# EAGLE board 32u4 board (EAGLE 7.2.0)
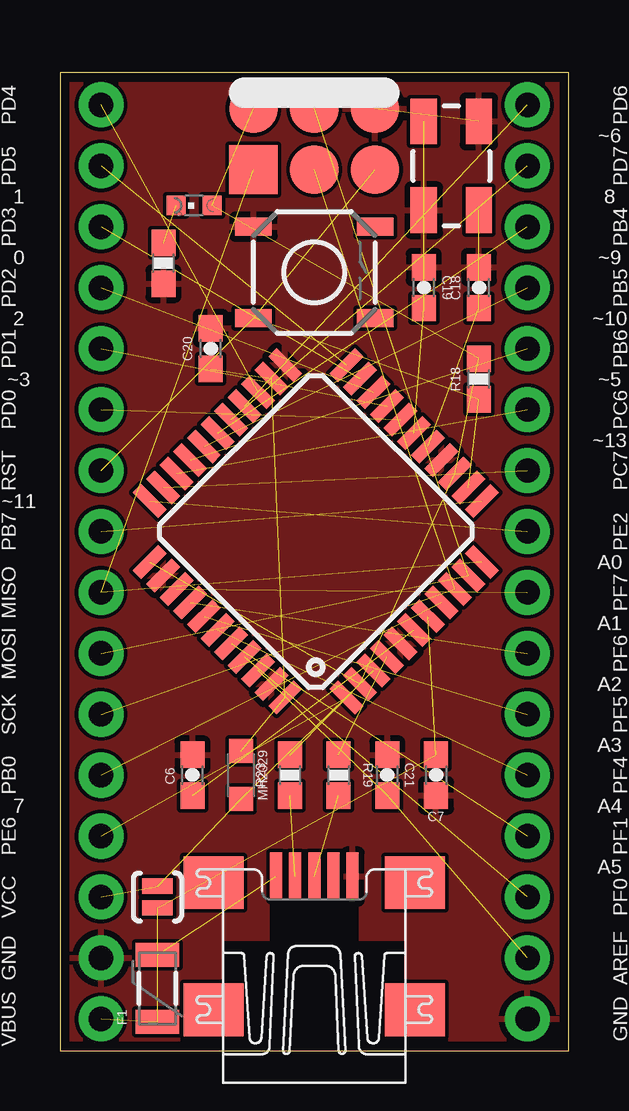
[diagram p0: board, top side]
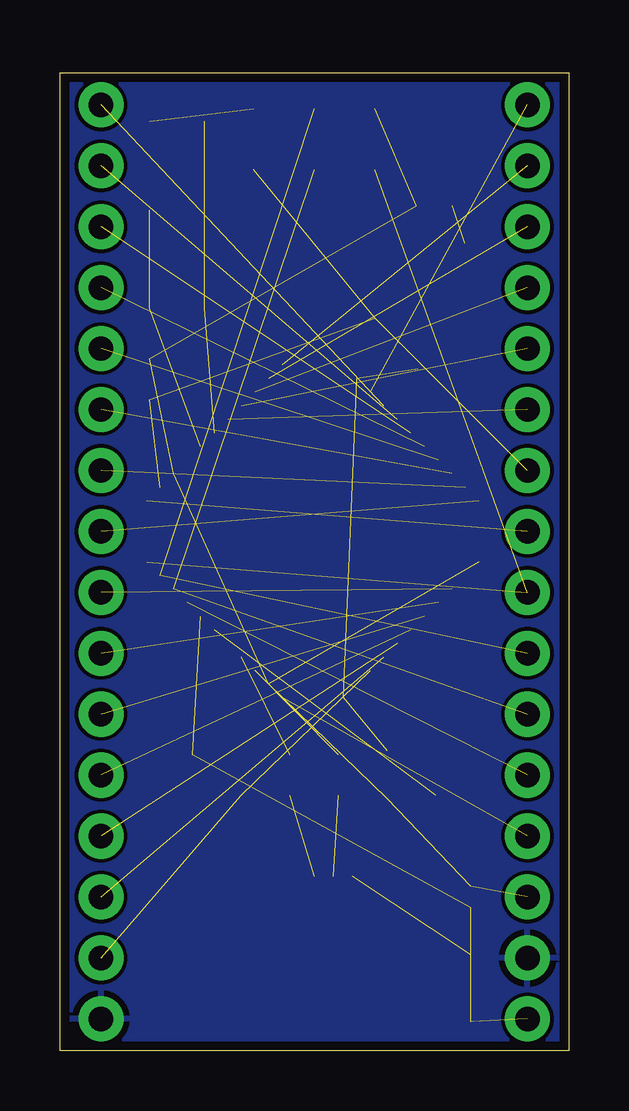
[diagram p1: board, bottom side, seen from below]

Size 21.21 x 40.77 mm. Coordinates in mm from the lower left corner, seen from the top.
Outline: 0,0 21.21,0 21.21,40.77 0,40.77 0,0
Copper layers (1*16): Top 0.0356mm / dielectric 1.5011mm / Bottom 0.0356mm
Design rules "LaenPCBOrder": minimum track width 6mil, minimum drill 13mil, track to track 6mil, track to pad 6mil, pad to pad 6mil, via to via 6mil, smd to smd 6mil, copper to edge 15mil, drill to drill 6mil, minimum pad ring 7mil, minimum via ring 7mil, stop-mask expansion 3mil, vias tented up to drill 0mil, thermal gap 10mil

## Footprints (pad centres in the part's own frame; a part is rotated, then mirrored left to right if it is on the bottom)
0603-CAP = smd 1.1 x 1: 1 -0.85,0; 2 0.85,0
PTC-1206 = smd 1 x 1.8: 1 -1.4,0; 2 1.4,0
1X16_NO_SILK = drill 1.016 pad 1.88: 1 0,0; 2 2.54,0; 3 5.08,0; 4 7.62,0; 5 10.16,0; 6 12.7,0; 7 15.24,0; 8 17.78,0; 9 20.32,0; 10 22.86,0; 11 25.4,0; 12 27.94,0; 13 30.48,0; 14 33.02,0; 15 35.56,0; 16 38.1,0
CHIPLED_0603 = smd 0.8 x 0.8: A 0,-0.75; C 0,0.75
L2012C = smd 1 x 1: 1 -1,0; 2 1,0
0603-RES = smd 1.1 x 1: 1 -0.85,0; 2 0.85,0
TACTILE_SWITCH_SMD = smd 1.524 x 0.762: 1 -2.54,1.905; 2 2.54,1.905; 3 -2.54,-1.905; 4 2.54,-1.905
SJ_2S-NO = smd 0.635 x 1.27: 1 -0.45,0; 2 0.45,0
ICSP = smd 2.032 x 2.032: 1 -2.54,1.27; 2 0,1.27; 3 2.54,1.27; 4 2.54,-1.27; 5 0,-1.27; 6 -2.54,-1.27
TQFP44 = smd 1.5 x 0.5: 1 -5.8,4; 2 -5.8,3.2; 3 -5.8,2.4; 4 -5.8,1.6; 5 -5.8,0.8; 6 -5.8,0; 7 -5.8,-0.8; 8 -5.8,-1.6; 9 -5.8,-2.4; 10 -5.8,-3.2; 11 -5.8,-4; 23 5.8,-4; 24 5.8,-3.2; 25 5.8,-2.4; 26 5.8,-1.6; 27 5.8,-0.8; 28 5.8,0; 29 5.8,0.8; 30 5.8,1.6; 31 5.8,2.4; 32 5.8,3.2; 33 5.8,4 | smd 0.5 x 1.5: 12 -4,-5.8; 13 -3.2,-5.8; 14 -2.4,-5.8; 15 -1.6,-5.8; 16 -0.8,-5.8; 17 0,-5.8; 18 0.8,-5.8; 19 1.6,-5.8; 20 2.4,-5.8; 21 3.2,-5.8; 22 4,-5.8; 34 4,5.8; 35 3.2,5.8; 36 2.4,5.8; 37 1.6,5.8; 38 0.8,5.8; 39 0,5.8; 40 -0.8,5.8; 41 -1.6,5.8; 42 -2.4,5.8; 43 -3.2,5.8; 44 -4,5.8
CRYSTAL-SMD-5X3 = smd 1.9 x 1.1: 1 -1.85,-1.15; 2 1.85,-1.15; 3 1.85,1.15; 4 -1.85,1.15
UX60A-MB-5ST = smd 2 x 0.5: 1 2.25,1.6; 2 2.25,0.8; 3 2.25,0; 4 2.25,-0.8; 5 2.25,-1.6 | smd 2.2 x 2.5: M1 -3.3,-4.2; M2 -3.3,4.2; M3 2,4.2; M4 2,-4.2

## Placement (x,y rotation side)
C6  1uF  [0603-CAP]  5.52,11.49 90 top
C7  1.0uF  [0603-CAP]  15.68,11.49 270 top
C18  18pF  [0603-CAP]  17.47,31.81 90 top
C19  18pF  [0603-CAP]  15.18,31.81 90 top
C20  0.1uF  [0603-CAP]  6.29,29.27 90 top
C21  0.1uF  [0603-CAP]  13.65,11.49 90 top
F1  PTCSMD  [PTC-1206]  4.06,2.6 90 top
JP1  M161X16_NO_SILK  [1X16_NO_SILK]  19.49,39.43 270 top
JP2  M161X16_NO_SILK  [1X16_NO_SILK]  1.71,1.33 90 top
LED1  [CHIPLED_0603]  5.59,35.24 90 top
MH2029  MH2029-300Y  [L2012C]  7.56,11.49 270 top
R1  1k  [0603-RES]  4.32,32.83 90 top
R18  10k  [0603-RES]  17.46,28 90 top
R19  22  [0603-RES]  11.62,11.49 270 top
R23  22  [0603-RES]  9.59,11.49 270 top
S1  SWITCH-MOMENTARY-2SMD  [TACTILE_SWITCH_SMD]  10.6,32.45 0 top
SJ1  SOLDERJUMPERNO  [SJ_2S-NO]  4.06,6.41 90 top
U$2  ICSP_SMD  [ICSP]  10.6,38 0 top
U$3  ATMEGA32U4TQFP-44  [TQFP44]  10.67,21.65 135 top
U$4  CRYSTAL-GROUNDED  [CRYSTAL-SMD-5X3]  16.32,36.89 90 top
X1  MINI-USB-UX60A-MB-5ST  [UX60A-MB-5ST]  10.6,5.02 90 top

## Library data of the parts
C6 C18-C21 = SparkFun-Capacitors; PROD_ID: CAP-00810
C7 = SparkFun-Capacitors; PROD_ID: CAP-00868
F1 = SparkFun-PowerIC; PROD_ID: RES-11150
JP1 JP2 = SparkFun-Connectors
LED1 = adafruit
MH2029 = resistor
R1 = SparkFun-Resistors
R18 R19 R23 = SparkFun-Passives
S1 = SparkFun-Electromechanical
SJ1 = SparkFun-Retired
U$2 = Jake
U$3 = SparkFun-DigitalIC
U$4 = SparkFun-FreqCtrl
X1 = con-hirose; OC_FARNELL: unknown; OC_NEWARK: unknown

## Nets
AREF: C21.1 JP1.15 U$3.42
D+: R19.2 X1.3
D-: R23.2 X1.2
GND: C6.2 C7.2 C18.2 C19.2 C20.2 C21.2 JP1.16 JP2.2 R1.1 S1.1 U$2.3 U$3.5 U$3.15 U$3.23 U$3.35 U$3.43 U$4.2 U$4.4 X1.5
MISO: JP2.8 U$2.6 U$3.11
MOSI: JP2.7 U$2.2 U$3.10
N$1: LED1.C R1.2
N$2: F1.2 X1.1
N$23: R19.1 U$3.4
N$24: R23.1 U$3.3
N$27: C6.1 U$3.6
N$31: C20.1 MH2029.1 U$3.24 U$3.44
N$39: C19.1 U$3.17 U$4.3
N$41: C18.1 U$3.16 U$4.1
PB0: JP2.5 U$3.8
PB4: JP1.3 U$3.28
PB5: JP1.4 U$3.29
PB6: JP1.5 U$3.30
PB7: JP2.9 U$3.12
PC6: JP1.6 U$3.31
PC7: JP1.7 U$3.32
PD0: JP2.11 U$3.18
PD1: JP2.12 U$3.19
PD2: JP2.13 U$3.20
PD3: JP2.14 U$3.21
PD4: JP2.16 U$3.25
PD5: JP2.15 U$3.22
PD6: JP1.1 U$3.26
PD7: JP1.2 U$3.27
PE2: JP1.8 U$3.33
PE6: JP2.4 U$3.1
PF0: JP1.14 U$3.41
PF1: JP1.13 U$3.40
PF4: JP1.12 U$3.39
PF5: JP1.11 U$3.38
PF6: JP1.10 U$3.37
PF7: JP1.9 U$3.36
RST: JP2.10 R18.1 S1.3 U$2.4 U$3.13
SCK: JP2.6 U$2.5 U$3.9
VBUS: C7.1 F1.1 JP2.1 SJ1.1 U$3.7
VCC: JP2.3 LED1.A MH2029.2 R18.2 SJ1.2 U$2.1 U$3.2 U$3.14 U$3.34

## Tracks (layer width: path | path; a pad name or v marks a point on that pad's centre or on a via)
AREF  (2 unrouted)
D+  (1 unrouted)
D-  (1 unrouted)
GND  (1 unrouted)
  pour Bottom: -5.33,-2.03 31.11,-1.71 30.99,50.8 -5.33,50.8
  pour Top: -6.1,51.56 31.75,51.56 31.88,-2.48 -6.03,-2.79
MISO  (2 unrouted)
MOSI  (2 unrouted)
N$1  (1 unrouted)
N$2  (1 unrouted)
N$23  (1 unrouted)
N$24  (1 unrouted)
N$27  (1 unrouted)
N$31  (3 unrouted)
N$39  (2 unrouted)
N$41  (2 unrouted)
PB0  (1 unrouted)
PB4  (1 unrouted)
PB5  (1 unrouted)
PB6  (1 unrouted)
PB7  (1 unrouted)
PC6  (1 unrouted)
PC7  (1 unrouted)
PD0  (1 unrouted)
PD1  (1 unrouted)
PD2  (1 unrouted)
PD3  (1 unrouted)
PD4  (1 unrouted)
PD5  (1 unrouted)
PD6  (1 unrouted)
PD7  (1 unrouted)
PE2  (1 unrouted)
PE6  (1 unrouted)
PF0  (1 unrouted)
PF1  (1 unrouted)
PF4  (1 unrouted)
PF5  (1 unrouted)
PF6  (1 unrouted)
PF7  (1 unrouted)
RST  (4 unrouted)
SCK  (2 unrouted)
VBUS  (4 unrouted)
VCC  (8 unrouted)

## Text on the board
tNames: 4 | PD4 | PD6 | ~12 | ~6 | PD5 | PD7 | 1 | 8 | <TX1 | PD3 | PB4 | 0 | ~9 | PD2 | PB5 | 2 | ~10 | PD1 | PB6 | ~3 | ~5 | PD0 | PC6 | ATmega32U4 / Breakout Board / #ROVESOHARD | ~13 | RST | PC7 | ~11 | PB7 | PE2 | A0 | MISO | PF7 | A1 | MOSI | PF6 | A2 | SCK | PF5 | A3 | PB0 | PF4 | 7 | A4 | PE6 | PF1 | A5 | VCC | PF0 | GND | AREF | VBUS | GND